# Altium PCB 3phasedriver.PcbDoc
Units mm, origin at the board's own origin, x right, y up, seen from the top; angles counter-clockwise.
Board outline 80.39 x 38.35 mm, 2 copper layers (Top Layer, Bottom Layer); 51 components, 69 nets, 254 pads, 69 vias.
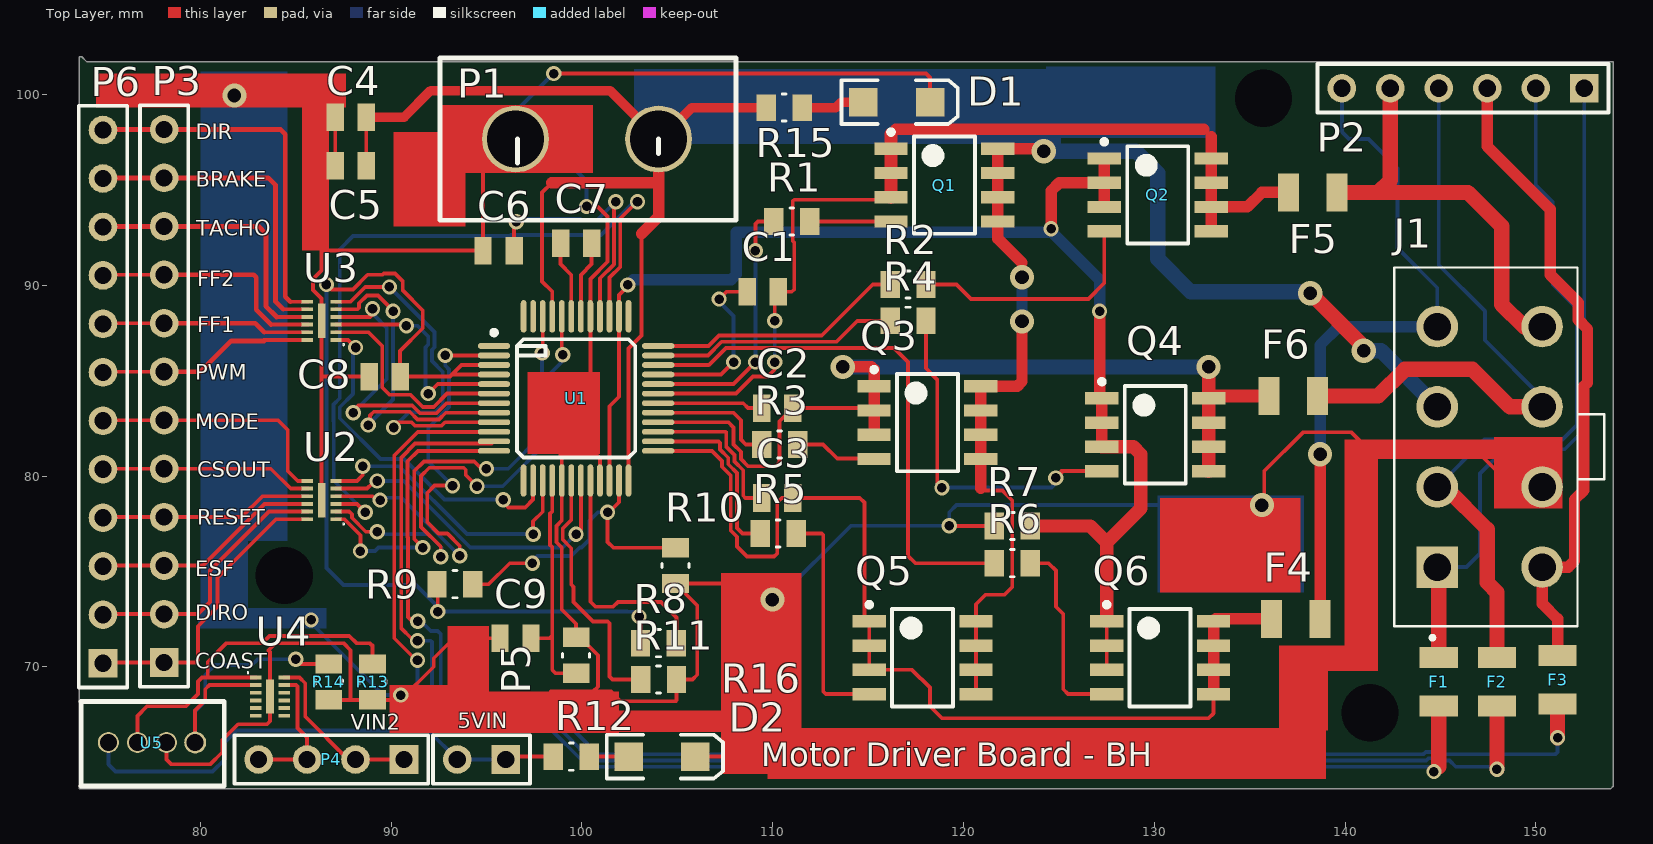
[diagram p0: Top Layer view]
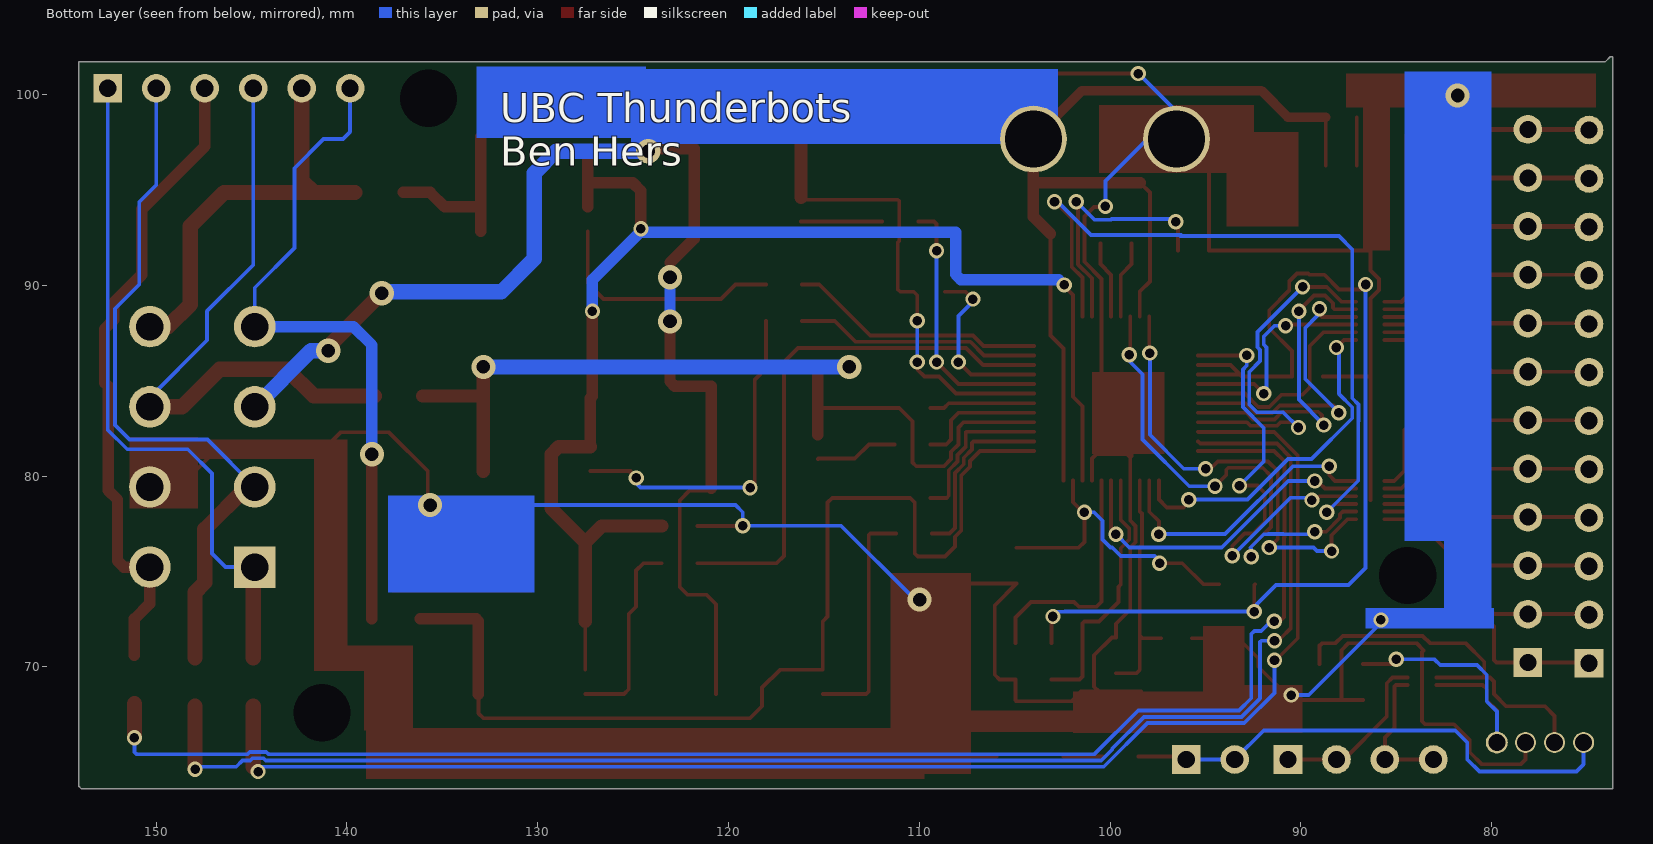
[diagram p1: Bottom Layer view, seen from below]

## Layer stack, top to bottom
Top Solder: solder mask 0.0102, Solder Resist, Dk 3.5
Top Layer: signal copper 0.0356
Dielectric 1: dielectric 0.32, FR-4, Dk 4.8
Bottom Layer: signal copper 0.0356
Bottom Solder: solder mask 0.0102, Solder Resist, Dk 3.5

## Board outline
73.66,101.981 73.66,63.627 153.924,63.627 154.051,63.754 154.051,101.727 74.041,101.727 73.787,101.981

## Design rules (kind name [scope] priority, off if disabled: settings)
Clearance [All] p1: gap=0.2 ignorepadtopadclearanceinfootprint=FALSE except(0: Arc-Hole Track-Hole SMDPad-Hole THPad-Hole Via-Hole Fill-Hole Poly-Hole Region-Hole Text-Hole; 0.13: Arc-Arc Arc-Track Arc-SMDPad Track-Track Track-SMDPad; 0.254: Arc-Text Track-Text SMDPad-Text THPad-Text Via-Fill Via-Poly Via-Region Via-Text Fill-Fill Fill-Poly Fill-Region Fill-Text Poly-Poly Poly-Region Poly-Text Region-Region Region-Text Text-Text)
HoleSize [All] p1: absolutevalues=TRUE maxlimit=4 minlimit=0.025 maxpercent=80.000 minpercent=20.000
MinimumSolderMaskSliver [All] p1: minsoldermaskwidth=0.08
PolygonConnect [All] p1: connectstyle=Relief reliefconductorwidth=0.254 reliefentries=4 polygonreliefangle="90 Angle" airgapwidth=0.254
RoomDefinition 3phasedriver [InComponentClass('3phasedriver')] p1: confinementstyle=ConfineIn formatcopy=TRUE lockcomponents=FALSE outline 73.279,63.246 73.279,101.854 92.075,101.854 92.456,102.235 127.248,102.235 127.629,101.854 154.051,101.854 154.051,63.5 153.797,63.246
RoutingVias [All] p1: holewidth=0.711 width=1.27 viastyle="Through Hole" minholewidth=0.5 minwidth=0.8 maxholewidth=0.711 maxwidth=1.27
SilkToSilkClearance [All] p1 off: silktosilkclearance=0
SilkToSolderMaskClearance [IsPad] p1 off: minsilkscreentomaskgap=0.15 clearancetoexposedcopper=FALSE
SolderMaskExpansion [All] p1: expansion=0.102
Width [All] p1: maxlimit=1 minlimit=0.15 preferedwidth=0.2
26 further rules are at their usual default settings.

## Components (designator, comment, footprint, x,y, rotation, side; value= is the part's Value field where it differs from the comment)
C1 "0805" CAPC2013X110N 109.474,89.662 r0 top
C2 "0805" CAPC2013X110N 110.236,83.566 r0 top
C3 "0805" CAPC2013X110N 110.236,78.856 r0 top
C4 "0805" CAPC2013X110N 87.884,98.806 r0 top
C5 "0805" CAPC2013X110N 87.884,96.266 r0 top
C6 "0805" CAPC2013X110N 95.631,91.821 r0 top
C7 "0805" CAPC2013X110N 99.695,92.202 r0 top
C8 "0805" CAPC2013X110N 89.662,85.217 r0 top
C9 "0805" CAPC2013X110N 96.52,71.501 r0 top
D1 "LED2" 3.2X1.6X1.1 116.5,99.6 r0 top
D2 "LED2" 3.2X1.6X1.1 104.2,65.3 r0 top
F1 "Fuse 1206" PCBComponent_1#1 145.288,71.501 r90 top
F2 "Fuse 1206" PCBComponent_1#1 148.336,71.501 r90 top
F3 "Fuse 1206" PCBComponent_1#1 151.511,71.628 r90 top
F4 "Fuse 1206" PCBComponent_1#1 139.7,72.136 r0 top
F5 "Fuse 1206" PCBComponent_1#1 140.589,94.488 r0 top
F6 "Fuse 1206" PCBComponent_1#1 139.573,83.82 r0 top
J1 "Motor Molex Connector" *MOLEX_0039281083 147.574,81.534 r90 top
P1 "XT60" PCBComponent_1#2 108.07,93.413 r180 top
P2 "Header 6" HDR1X6 152.527,100.33 r180 top
P3 "Header 12" HDR1X12 78.105,70.231 r90 top
P4 "Header 4" HDR1X4 90.678,65.151 r180 top
P5 "Header 2" HDR1X2 96.012,65.151 r180 top
P6 "Header 12" HDR1X12 74.9,70.199 r90 top
Q1 "AO4884" SOIC127P600X170-8N 118.999,95.25 r0 top
Q2 "AO4884" SOIC127P600X170-8N 130.175,94.742 r0 top
Q3 "AO4884" SOIC127P600X170-8N 118.11,82.804 r0 top
Q4 "AO4884" SOIC127P600X170-8N 130.048,82.169 r0 top
Q5 "AO4884" SOIC127P600X170-8N 117.856,70.485 r0 top
Q6 "AO4884" SOIC127P600X170-8N 130.302,70.485 r0 top
R1 "0805" RESC2013X65N 110.998,93.345 r180 top
R2 "0805" RESC2013X65N 117.094,90.043 r180 top
R3 "0805" RESC2013X65N 110.363,81.661 r180 top
R4 "0805" RESC2013X65N 117.094,88.138 r180 top
R5 "0805" RESC2013X65N 110.287,76.996 r180 top
R6 "0805" RESC2013X65N 122.555,75.438 r180 top
R7 "0805" RESC2013X65N 122.555,77.389 r0 top
R8 "0805-100k" RESC2013X65N 104.013,71.247 r0 top
R9 "0805-150K" RESC2013X65N 93.345,74.336 r0 top
R10 "0805-10K" RESC2013X65N 104.902,75.311 r270 top
R11 "0805-10K" RESC2013X65N 104.02,69.342 r0 top
R12 "0805-47k" RESC2013X65N 99.695,70.612 r90 top
R13 "0805" RESC2013X65N 89.027,69.215 r90 top
R14 "0805" RESC2013X65N 86.741,69.215 r90 top
R15 "0805" RESC2013X65N 110.6,99.314 r180 top
R16 "0805" RESC2013X65N 99.445,65.3 r180 top
U1 "A3931" CQFP50P900X900X160-48N 99.695,84.074 r0 top
U2 "EMI Filter" Filter 86.614,80.645 r90 top
U3 "EMI Filter" Filter 86.614,90.043 r90 top
U4 "EMI Filter" Filter 83.4,66.548 r270 top
U5 "Encoder" PCBComponent_1#3 76.811,65.913 r180 top

## Footprints (in the part's own frame and the unit in brackets; to place one, negate y for a bottom-side part, rotate by r counter-clockwise, add the part's x,y. Pads: shape width x height; smd on the part's side, far side on the other; paste and mask are expansions set on the pad)
3.2X1.6X1.1 [mm] "SMT LED; 2 Flat Leads"
  rect 1.5x1.5 smd: 1(-1.75,0) 2(1.75,0)
  silkscreen extent -2.9,-1.15 3.2,1.15
*MOLEX_0039281083 [mm]
  rect 2.175x2.175 hole 1.45: 1(-6.3,2.75)
  round 2.175 hole 1.45: 2(-2.1,2.75) 3(2.1,2.75) 4(6.3,2.75) 5(-6.3,-2.75) 6(-2.1,-2.75) 7(2.1,-2.75) 8(6.3,-2.75)
  silkscreen extent -10.1,-6 9.4,5
CAPC2013X110N [mil]
  rect 36x57 smd: 1(-32,0) 2(32,0)
CQFP50P900X900X160-48N [mm] "CQFP, 48-Leads, Body 9.00x9.00mm, Pitch 0.50mm, IPC Medium Density"
  oval 1.7x0.3 smd: 1(-4.3,2.75) 2(-4.3,2.25) 3(-4.3,1.75) 4(-4.3,1.25) 5(-4.3,0.75) 6(-4.3,0.25) 7(-4.3,-0.25) 8(-4.3,-0.75) 9(-4.3,-1.25) 10(-4.3,-1.75) 11(-4.3,-2.25) 12(-4.3,-2.75) 25(4.3,-2.75) 26(4.3,-2.25) 27(4.3,-1.75) 28(4.3,-1.25) 29(4.3,-0.75) 30(4.3,-0.25) 31(4.3,0.25) 32(4.3,0.75) 33(4.3,1.25) 34(4.3,1.75) 35(4.3,2.25) 36(4.3,2.75)
  oval 0.3x1.7 smd: 13(-2.75,-4.3) 14(-2.25,-4.3) 15(-1.75,-4.3) 16(-1.25,-4.3) 17(-0.75,-4.3) 18(-0.25,-4.3) 19(0.25,-4.3) 20(0.75,-4.3) 21(1.25,-4.3) 22(1.75,-4.3) 23(2.25,-4.3) 24(2.75,-4.3) 37(2.75,4.3) 38(2.25,4.3) 39(1.75,4.3) 40(1.25,4.3) 41(0.75,4.3) 42(0.25,4.3) 43(-0.25,4.3) 44(-0.75,4.3) 45(-1.25,4.3) 46(-1.75,4.3) 47(-2.25,4.3) 48(-2.75,4.3)
  silkscreen extent -4.42,-3.1 3.1,3.57, body extent -3.5,-3.5 3.5,3.5, height 1.6
Filter [mm] "EMIFilter"
  rect 0.2x0.6 smd mask+0.05: 1(-2.9,-0.5) 2(-2.5,-0.5) 3(-2.1,-0.5) 4(-1.7,-0.5) 5(-1.3,-0.5) 6(-0.9,-0.5) 7(-2.9,1) 8(-2.5,1) 9(-2.1,1) 10(-1.7,1) 11(-1.3,1) 12(-0.9,1)
  rect 1.8x0.4 smd: GND(-1.905,0.254)
  silkscreen extent -3.2,-0.95 -3.1,-0.85
HDR1X2 [mm] "Connector; Header; 2 Position"
  rect 1.5x1.5 hole 0.9: 1(0,0)
  round 1.5 hole 0.9: 2(2.54,0)
  silkscreen extent -1.27,-1.27 3.81,1.27
HDR1X4 [mm] "Connector; Header; 4 Position"
  rect 1.5x1.5 hole 0.9: 1(0,0)
  round 1.5 hole 0.9: 2(2.54,0) 3(5.08,0) 4(7.62,0)
  silkscreen extent -1.27,-1.27 8.89,1.27
HDR1X6 [mm] "Connector; Header; 6 Position"
  rect 1.5x1.5 hole 0.9: 1(0,0)
  round 1.5 hole 0.9: 2(2.54,0) 3(5.08,0) 4(7.62,0) 5(10.16,0) 6(12.7,0)
  silkscreen extent -1.27,-1.27 13.97,1.27
HDR1X12 [mm] "Connector; Header; 12 Position"
  rect 1.5x1.5 hole 0.9: 1(0,0)
  round 1.5 hole 0.9: 2(2.54,0) 3(5.08,0) 4(7.62,0) 5(10.16,0) 6(12.7,0) 7(15.24,0) 8(17.78,0) 9(20.32,0) 10(22.86,0) 11(25.4,0) 12(27.94,0)
  silkscreen extent -1.27,-1.27 29.21,1.27
PCBComponent_1#1 [mm]
  rect 1.1x2 smd: 1(-3.556,0.381) 2(-1.016,0.381)
PCBComponent_1#2 [mm]
  round 3.5 hole 3: 1(4.05,-4.25) 2(11.55,-4.25)
  silkscreen extent 0,-8.5 15.5,0
PCBComponent_1#3 [mm]
  round 1.1 hole 0.9: 5V(1.627,-0.127) GND(-1.421,-0.127) VIN2(0.103,-0.127)
  round 1.15 hole 0.9: VIN1(-2.921,-0.127)
  silkscreen extent -4.44,-2.29 3.06,2.16
RESC2013X65N [mil]
  rect 40x55 smd: 1(-37,0) 2(37,0)
  silkscreen extent -4,-28 4,28
SOIC127P600X170-8N [mm] "SOIC, 8-Leads, Body 5.00x3.90mm, Pitch 1.27mm, IPC Medium Density"
  rect 1.75x0.65 smd: D(2.8,-1.905) D(2.8,-0.635) D(2.8,0.635) D(2.8,1.905) G(-2.8,-1.905) S(-2.8,-0.635) S(-2.8,0.635) S(-2.8,1.905)
  silkscreen extent -2.92,-2.55 1.6,2.9, body extent -2,-2.55 2,2.55, height 1.7

## Part data
C1 C2 C3 C4 C5 C6 C7 C8 C9: library part C0805C104K5RACTU, "Capacitor; Ceramic; Cap; .100UF ; Tol+-10%; SMD; Vol-Rtg 50V; X7R, Tape/Reel", Package="0805 Kemet", Availability=Good, MF=Kemet, MP=C0805C104K5RACTU, Price="0.86 USD"
D1 D2: "Typical RED, GREEN, YELLOW, AMBER GaAs LED", LatestRevisionDate=17-Jul-2002, LatestRevisionNote="Re-released for DXP Platform.", PackageDescription="SM LED; 2 Flat Leads", PackageReference=3.2X1.6X1.1, PackageVersion=Feb-2002, Published=8-Jun-2000, Publisher="Altium Limited"
F1 F2 F3 F4 F5 F6: library part F?
J1: library part 0039281083, "Conn Power HDR 8 POS 4.2mm Solder ST Thru-Hole 8 Terminal 1 Port Mini-Fit Jr??? Bag", Package=None, Availability=Unavailable, MF=Molex, MP=0039281083, Price=None, SnapEDA_Link=https://www.snapeda.com/parts/0039281083/Molex/view-part/?ref=snap
P1 Q1 Q2 Q3 Q4 Q5 Q6 U1 U5: library part Component_1
P2: "Header, 6-Pin", LatestRevisionDate=17-Jul-2002, LatestRevisionNote="Re-released for DXP Platform.", Publisher="Altium Limited"
P3 P6: "Header, 12-Pin", LatestRevisionDate=17-Jul-2002, LatestRevisionNote="Re-released for DXP Platform.", Publisher="Altium Limited"
P4: "Header, 4-Pin", LatestRevisionDate=17-Jul-2002, LatestRevisionNote="Re-released for DXP Platform.", Publisher="Altium Limited"
P5: "Header, 2-Pin", LatestRevisionDate=17-Jul-2002, LatestRevisionNote="Re-released for DXP Platform.", Publisher="Altium Limited"
R1 R2 R3 R4 R5 R6 R7 R8 R9 R10 R11 R13 R14 R15 R16: library part RC0805FR-072K2L, "Res Thick Film 0805 2.2K Ohm 1% 0.125W_1/8W_ }100ppm/ Molded SMD Paper T/R", Package="0805 Yageo", Availability=Good, MF=Yageo, MP=RC0805FR-072K2L, Price="0.01 USD", SnapEDA_Link=https://www.snapeda.com/parts/RC0805FR-072K2L/Yageo/view-part/?ref=snap
R12: library part RC0805FR-072K2L, "47 kOhms ±1% 0.125W, 1/8W Chip Resistor 0805 (2012 Metric) Moisture Resistant Thick Film", Package="0805 Yageo", Availability=Good, MF=Yageo, MP=RC0805FR-072K2L, Price="0.01 USD", SnapEDA_Link=https://www.snapeda.com/parts/RC0805FR-072K2L/Yageo/view-part/?ref=snap
U2 U3 U4: library part EMIFilter

## Free pads (board coordinates)
  round 1.524 hole 3: 3(84.4,74.8) 3(135.725,99.8) 3(141.3,67.6)

## Via types
v1: diameter 0.8, hole 0.5, Top Layer to Bottom Layer, tented both sides, 58 vias
v2: diameter 1.27, hole 0.711, Top Layer to Bottom Layer, 11 vias

## Nets (pads, with @x,y where several pads share a name; then routed paths per layer and width w, separated by ;. In a path a pad name is that pad's centre, name@x,y a point inside that pad or via, vN(x,y) a via of type N, cw(c..) or ccw(c..) an arc to the next point about the centre after c; other vN are vias at no path point)
5VIN: P5.1 P5.2 R16.2 U5.5V | length 26.7
  Top Layer w0.2: P5.1 96.161,65.3 R16.2
  Bottom Layer w0.2: U5.5V 75.184,64.897 75.565,64.516 80.645,64.516 81.28,65.151 81.28,66.04 81.915,66.675 91.948,66.675 P5.2 P5.1
BRAKE: U1.8 U3.5 | length 17.4
  Top Layer w0.2: U3.5 88.235,88.743 88.327,88.835 88.327,89.063 88.737,89.473 89.317,89.473 89.952,88.838 90.105,88.838 v1(90.105,88.646) ; v1@88.9,83.058 88.9,83.185 89.093,83.378 90.975,83.378 91.385,82.968 92.511,82.968 92.867,83.324 U1.8
  Bottom Layer w0.2: v1(88.809,82.677) 88.809,82.713 90.105,84.009 v1(90.105,88.646)
CA: C1.1 U1.33 | length 9.3
  Top Layer w0.2: U1.33 107.295,85.324 v1(107.95,85.979) ; v1(107.188,89.281) 107.569,89.662 C1.1
  Bottom Layer w0.2: v1@107.315,89.154 107.315,89.027 107.95,88.392 v1(107.95,85.979)
CB: C2.1 U1.30 | length 5.5
  Top Layer w0.2: U1.30 108.454,83.824 108.712,83.566 C2.1
CC: C3.1 U1.27 | length 8.3
  Top Layer w0.2: U1.27 107.541,82.324 107.569,82.296 107.569,81.534 108.001,81.102 108.001,80.762 108.458,80.305 108.458,78.973 108.575,78.856 C3.1
COAST: U1.46 U2.1 | length 23.8
  Top Layer w0.2: U2.1 87.553,77.745 88.392,76.906 v1(88.392,76.073) ; v1(91.658,76.255) 91.211,76.702 91.211,80.264 91.719,80.772 94.361,80.772 94.742,80.391 v1(94.996,80.391) ; v1@97.945,86.642 U1.46
  Bottom Layer w0.2: v1(88.392,76.073) 89.154,76.073 89.336,76.255 v1(91.658,76.255) ; v1(94.996,80.391) 96.139,80.391 97.917,82.169 v1(97.917,86.451)
CP1: C7.2 U1.42 | length 4.1
  Top Layer w0.2: U1.42 99.945,90.547 100.508,91.11 C7.2
CP2: C7.1 U1.43 | length 4.1
  Top Layer w0.2: C7.1 98.882,91.11 99.445,90.547 U1.43
CSN: C4.1 C5.1 C6.1 C8.1 C9.1 D1.2 D2.2 J1.6 P1.2 R7.1 R10.2 R11.2 R12.2 R13.1 R14.1 U1.17 U1.21 U1.41 U2.GND U3.GND U4.GND U5.GND | length 200.6
  Top Layer w0.2: U5.GND 78.232,65.151 78.486,64.897 80.518,64.897 81.153,65.532 81.153,66.167 81.986,67 83.5,67 83.654,67.154 U4.GND 83.654,70.778 83.566,70.866 83.947,71.247 87.503,71.247 87.873,70.877 87.873,68.286 87.884,68.275 ; U2.GND 86.36,85.217 ; 86.36,93.218 86.36,91.821 ; R14.1 87.884,68.275 ; C5.1 C4.1 ; C8.1 86.36,85.217 ; C9.1 93.283,71.501 92.238,70.456 92.238,70.013 90.5,68.275 R13.1 87.884,68.275 ; P1.2 94.818,95.961 C6.1 86.36,91.821 ; 98.385,68.707 100.584,68.707 ; v1(98.525,101.1) 118.034,101.1 118.25,100.884 D1.2 ; 98.882,83.665 98.882,81.039 98.945,80.976 ; 100.076,82.169 100.076,81.153 ; 100.445,84.836 U1.41 100.445,90.336 101.346,91.237 101.346,93.599 100.838,94.107 v1@100.445,94.107 ; U1.21 100.945,80.919 100.711,81.153 100.076,81.153 ; D2.2 108.3,65.3 ; 107.899,74.371 R10.2 106.045,73.228 106.045,69.596 105.791,69.342 R11.2 104.96,68.257 104.902,68.199 102.025,68.199 101.517,68.707 100.584,68.707 ; v1@119.426,77.389 R7.1 ; v2@135.763,78.272 135.763,80.264 137.795,82.296 140.335,82.296 141.224,81.407 146.812,81.407 148.785,79.434 J1.6 ; 86.36,85.217 U3.GND 86.36,89.307 85.914,89.753 85.914,90.333 86.36,90.779 86.36,91.821 ; 98.945,80.976 U1.17 98.945,77.669 98.665,77.389 98.665,76.535 98.945,76.255 98.945,73.013 99.695,72.263 R12.2 99.898,71.552 100.838,70.612 100.838,68.961 100.584,68.707 ; 98.945,80.976 99.122,81.153 100.076,81.153
  Bottom Layer w0.2: v1@85.856,72.263 89.59,68.529 v1(90.507,68.529) ; v1(98.525,101.1) 98.506,101.1 96.52,99.114 P1.2 98.044,97.663 100.247,95.46 v1(100.247,94.133) ; v2@110.363,73.66 114.102,77.399 v1(119.253,77.399) 119.253,78.105 119.634,78.486 v2(135.636,78.486)
  other v1: 85.808,72.466
  other v2: 109.982,73.533 81.788,99.949
CSOUT: U1.19 U2.5 | length 17.1
  Top Layer w0.2: U2.5 88.743,79.345 v1@89.027,79.629 ; v1(99.695,76.962) 99.945,77.212 U1.19
  Bottom Layer w0.2: v1(89.281,79.745) 90.667,79.745 94.15,76.262 98.995,76.262 v1(99.695,76.962)
CSP: Q2.S Q4.S Q6.S R7.2 U1.22 U1.38 | length 73.6
  Top Layer w0.2: U1.22 101.445,83.665 101.945,84.165 U1.38 101.945,89.499 v1@102.235,89.789 ; Q4.S@127.127,84.195 Q4.S@127.248,84.074 ; Q6.S@127.502,69.85 127.502,71.12 Q6.S@127.502,72.39
  Top Layer w0.6: v1(124.587,92.964) 124.587,94.945 125.019,95.377 Q2.S@127.375,95.377 ; Q4.S@127.127,84.195 v1(127.127,88.646) ; Q4.S@127.248,81.534 127.248,82.804 Q4.S@127.248,84.074 ; Q2.S@127.375,94.107 Q2.S@127.375,95.377 ; Q2.S@127.375,96.647 Q2.S@127.375,95.377
  Top Layer w0.7: R7.2 126.636,77.389 127.502,76.522 ; Q4.S@127.248,81.534 128.905,81.534 129.286,81.153 129.286,78.306 127.502,76.522 ; Q6.S@127.502,72.39 127.502,76.522
  Bottom Layer w0.2: v1(102.406,90.019) v1@102.687,90.3 ; v1(124.587,92.964) 124.587,92.837 v1@124.65,92.773
  Bottom Layer w0.6: v1@102.687,90.3 107.826,90.3 108.1,90.574 108.1,92.773 124.65,92.773 127.127,90.297 v1(127.127,88.646)
DIR: U1.9 U3.6 | length 19.1
  Top Layer w0.2: U3.6 87.873,89.143 88.646,89.916 v1(89.916,89.916) ; v1@90.105,82.677 90.252,82.824 91.062,82.824 91.248,82.638 92.648,82.638 92.834,82.824 U1.9
  Bottom Layer w0.2: v1(89.916,89.916) 92.278,87.554 92.278,86.755 92.137,86.614 92.137,86.034 92.71,85.461 92.71,83.761 92.301,83.352 90.932,83.352 v1(90.13,82.55)
DIRO: U1.44 U2.2 | length 26.6
  Top Layer w0.2: U2.2 87.803,78.145 87.946,78.002 87.946,77.819 88.676,77.089 v1(89.281,77.089) ; v1(92.599,75.782) 92.599,76.304 91.567,77.336 91.567,80.01 91.999,80.442 93.802,80.442 93.912,80.332 93.912,80.061 v1(94.503,79.47) ; v1@98.945,86.626 U1.44
  Bottom Layer w0.2: v1(89.281,77.089) 89.415,76.955 90.925,76.955 90.932,76.962 91.694,76.962 91.701,76.955 91.948,76.955 92.658,76.245 92.599,76.186 v1(92.599,75.782) ; v1(94.503,79.47) 95.853,79.47 98.298,81.915 98.298,85.344 98.995,86.041 v1(98.995,86.36)
ESF: U1.39 U2.3 | length 39.4
  Top Layer w0.2: U2.3 88.21,78.545 v1(88.646,78.109) ; U1.39 101.445,90.402 102.006,90.963 102.006,93.497 v1@102.692,94.183
  Bottom Layer w0.2: v1@88.646,78.105 86.995,79.756 86.995,82.883 86.981,82.897 86.981,83.751 87.314,84.084 87.314,91.886 88.011,92.583 96.323,92.583 96.274,92.632 101.006,92.632 102.761,94.387 v1(102.914,94.387)
GHA: R1.2 U1.32 | length 13.5
  Top Layer w0.2: U1.32 107.938,84.824 v1@108.938,85.824 ; v1(109.093,91.808) 109.093,93.218 109.22,93.345 R1.2
  Bottom Layer w0.2: v1(109.093,85.979) v1@109.093,91.694
GHB: R3.2 U1.29 | length 6.7
  Top Layer w0.2: U1.29 107.938,83.324 108.331,82.931 108.331,81.915 108.585,81.661 R3.2
GHC: R5.2 U1.26 | length 9.4
  Top Layer w0.2: U1.26 107.152,81.824 107.239,81.737 107.239,81.397 107.671,80.965 107.671,80.626 108.128,80.169 108.128,77.288 108.42,76.996 R5.2
GLA: R2.2 U1.36 | length 13.5
  Top Layer w0.2: U1.36 106.636,86.824 107.188,87.376 112.572,87.376 115.239,90.043 R2.2
GLB: R4.2 U1.35 | length 12.9
  Top Layer w0.2: U1.35 106.603,86.324 107.325,87.046 113.335,87.046 114.427,88.138 R4.2
GLC: R6.2 U1.34 | length 28.6
  Top Layer w0.2: U1.34 106.652,85.824 107.544,86.716 116.357,86.716 117.094,85.979 117.094,75.819 117.475,75.438 R6.2
M1FF1: U1.6 U3.2 | length 11.5
  Top Layer w0.2: U3.2 88.809,87.543 89.536,86.816 89.536,84.649 89.922,84.263 91.023,84.263 91.658,83.628 92.238,83.628 92.934,84.324 U1.6
M1FF2: U1.5 U3.3 | length 11.9
  Top Layer w0.2: U3.3 90.746,87.943 v1(90.805,87.884) ; v1(91.948,84.328) 92.444,84.824 U1.5
  Bottom Layer w0.2: v1(90.805,87.884) 91.39,87.884 91.948,87.326 91.948,86.892 91.807,86.751 91.807,84.469 v1(91.948,84.328)
M1H1: F1.1 U1.10 | length 76.8
  Top Layer w0.2: v1@91.186,70.485 90.17,71.501 90.17,81.081 91.397,82.308 95.379,82.308 U1.10 ; v1(144.653,64.516) v1@144.907,64.77
  Top Layer w0.8: v1@144.907,64.77 F1.1
  Bottom Layer w0.2: v1(91.385,70.358) 91.385,68.642 92.971,67.056 98.044,67.056 100.33,64.77 v1@144.526,64.77
M1H2: F2.1 U1.11 | length 79.1
  Top Layer w0.2: v1@91.059,71.501 90.537,72.023 90.537,80.982 91.259,81.704 95.275,81.704 U1.11
  Top Layer w0.8: v1(147.955,64.643) F2.1
  Bottom Layer w0.2: v1(91.385,71.374) 92.075,71.374 92.137,71.312 92.137,68.356 93.107,67.386 98.222,67.386 99.884,65.724 99.884,65.683 100.467,65.1 144.247,65.1 144.363,65.216 144.943,65.216 145.059,65.1 145.466,65.1 145.796,64.77 v1@147.701,64.77
M1H3: F3.1 U1.12 | length 80.5
  Top Layer w0.2: v1@91.111,72.39 90.881,72.62 90.881,76.785 90.867,76.799 90.867,80.782 91.409,81.324 U1.12
  Top Layer w0.8: v1(151.13,66.294) F3.1
  Bottom Layer w0.2: v1(91.395,72.394) 91.563,72.394 92.075,71.882 92.441,71.882 92.599,71.724 92.599,68.361 93.244,67.716 98.527,67.716 100.813,65.43 144.11,65.43 144.226,65.546 145.08,65.546 145.196,65.43 151.028,65.43 151.13,65.532 v1(151.13,66.294)
M1P1: C2.2 F6.1 Q3.S Q4.D U1.28 | length 48.4
  Top Layer w0.2: U1.28 107.676,82.824 107.95,82.55 107.95,81.661 108.331,81.28 108.331,80.899 108.712,80.518 110.16,80.518 110.363,80.721 110.363,82.88 C2.2 115.183,83.566 Q3.S@115.31,83.439 ; 115.177,85.725 115.31,85.592 ; Q4.D@132.848,84.074 132.842,84.08 Q4.D@132.963,84.201
  Top Layer w0.6: v2(113.665,85.725) 115.177,85.725 ; Q3.S@115.31,82.169 115.31,83.439 115.31,84.709 115.31,85.592
  Top Layer w0.7: Q4.D@132.842,84.08 v2(132.842,85.725) ; Q4.D@132.848,80.264 132.848,81.534 132.848,82.804 Q4.D@132.848,84.074 ; Q4.D@132.963,84.201 F6.1
  Bottom Layer w0.2: v2@132.334,85.725 v2@132.588,85.471
  Bottom Layer w0.8: v2(113.665,85.725) v2@132.334,85.725
M1P2: C1.2 F5.1 Q1.S Q2.D U1.31 | length 50.9
  Top Layer w0.2: U1.31 108.073,84.324 108.966,85.217 109.728,85.217 110.109,85.598 v1@110.109,85.824 ; v1(110.109,88.138) 110.109,89.484 C1.2 110.998,89.662 111.125,89.789 111.125,92.253 111.049,92.329 111.049,94.412 111.125,94.488 116.072,94.488 Q1.S@116.199,94.615 ; 116.199,97.911 116.459,98.171 ; 132.594,98.171 132.975,97.79
  Top Layer w0.6: 116.459,98.171 132.594,98.171 ; Q2.D@132.975,92.837 Q2.D@132.975,94.107 ; 132.975,97.79 132.975,96.647 132.975,95.377 Q2.D@132.975,94.107 ; F5.1 135.636,94.869 134.874,94.107 Q2.D@132.975,94.107
  Top Layer w0.7: Q1.S@116.199,94.615 116.199,95.885 116.199,97.155 116.199,97.911
  Bottom Layer w0.2: v1(110.109,85.979) v1@110.109,88.011
M1P3: C3.2 F4.1 Q5.S Q6.D U1.25 | length 54.8
  Top Layer w0.2: U1.25 106.814,81.324 107.341,80.797 107.341,80.489 107.798,80.032 107.798,77.151 108.128,76.821 108.128,76.314 108.66,75.782 110.072,75.782 110.236,75.946 110.236,78.618 110.474,78.856 C3.2 114.565,78.856 114.808,78.613 114.808,72.638 115.056,72.39 115.056,71.12 115.056,69.85 117.308,69.85 118.237,68.921 118.237,67.945 118.872,67.31 132.842,67.31 133.102,67.57 Q6.D@133.102,68.58 ; Q6.D@133.102,72.39 Q6.D@133.229,72.517
  Top Layer w0.6: Q6.D@133.102,68.58 133.102,69.85 133.102,71.12 Q6.D@133.102,72.39 ; Q6.D@133.229,72.517 F4.1
MODE: U1.15 U2.6 | length 15.4
  Top Layer w0.2: U2.6 88.206,79.745 88.519,80.058 v1(88.519,80.518) ; v1(97.445,76.962) 97.445,77.633 97.945,78.133 U1.15
  Bottom Layer w0.2: v1(88.519,80.518) 90.424,80.518 93.98,76.962 v1(97.445,76.962)
NetC6_2: C6.2 U1.40 | length 13.5
  Top Layer w0.2: C6.2 96.444,93.212 v1(96.564,93.332) ; U1.40 100.945,90.369 101.676,91.1 101.676,94.183 v1@101.727,94.234
  Bottom Layer w0.2: v1@96.52,93.218 96.774,93.472 99.918,93.472 99.957,93.433 100.817,93.433 v1(101.771,94.387)
NetD1_1: D1.1 R15.1 | length 3.3
  Top Layer w0.5: R15.1 113.314,99.314 113.6,99.6 D1.1
NetD2_1: D2.1 R16.1 | length 2.1
  Top Layer w0.2: R16.1 D2.1
NetF1_2: F1.2 J1.1 P2.1 | length 35.8
  Top Layer w0.2: J1.1 J1.1@144.907,75.151
  Top Layer w0.8: F1.2 J1.1@144.907,75.151
  Bottom Layer w0.2: J1.1 146.354,75.234 147.066,75.946 147.066,80.137 148.336,81.407 151.511,81.407 152.527,82.423 P2.1
NetF2_2: F2.2 J1.2 P2.2 | length 37.7
  Top Layer w0.2: J1.2 J1.2@145.229,79.434
  Top Layer w0.8: J1.2@145.229,79.434 147.447,77.216 147.447,74.422 147.955,73.914 F2.2
  Bottom Layer w0.2: J1.2 147.305,81.915 151.384,81.915 152.146,82.677 152.146,88.773 150.876,90.043 150.876,94.361 149.987,95.25 P2.2
NetF3_2: F3.2 J1.5 P2.3 | length 34
  Top Layer w0.6: P2.3 147.447,97.282 150.749,93.98 150.749,90.551 152.212,89.088 152.212,88.199 152.7,87.711 152.7,84.904 152.5,84.704 152.5,79.253 152.019,78.772 152.019,75.565 151.688,75.234 J1.5 150.324,73.323 151.13,72.517 F3.2
NetF4_2: F4.2 J1.4 P2.6 | length 35.8
  Top Layer w0.6: F4.2 v2@138.684,80.899
  Bottom Layer w0.2: P2.6 139.827,98.044 140.208,97.663 141.224,97.663 142.748,96.139 142.748,91.948 144.824,89.872 J1.4
  Bottom Layer w0.6: v2(138.684,81.153) 138.684,86.868 139.65,87.834 J1.4
NetF5_2: F5.2 J1.8 P2.5 | length 21.8
  Top Layer w0.2: J1.8@149.366,87.834 J1.8
  Top Layer w0.8: F5.2 141.732,94.869 ; P2.5 142.367,95.504 141.732,94.869 ; J1.8@149.366,87.834 148.2,89 148.2,93.1 146.431,94.869 141.732,94.869
NetF6_2: F6.2 J1.7 P2.4 | length 32.1
  Top Layer w0.8: F6.2 141.732,84.201 143.129,85.598 146.673,85.598 148.637,83.634 J1.7
  Bottom Layer w0.2: P2.4 144.907,91.059 147.32,88.646 147.32,87.122 150.324,84.118 J1.7
NetP3_1: P3.1 P6.1 U2.7 | length 15.3
  Top Layer w0.2: P6.1@75.311,70.231 P3.1 79.756,70.231 79.883,70.358 79.883,72.136 80.899,73.152 80.899,74.676 83.968,77.745 U2.7
NetP3_2: P3.2 P6.2 U2.8 | length 13.5
  Top Layer w0.2: P6.2@75.311,72.771 P3.2 79.883,72.771 80.518,73.406 80.518,75.057 83.606,78.145 U2.8
NetP3_3: P3.3 P6.3 U2.9 | length 11.6
  Top Layer w0.2: P6.3@75.311,75.311 P3.3 80.137,75.311 83.371,78.545 U2.9
NetP3_4: P3.4 P6.4 U2.10 | length 10.8
  Top Layer w0.2: P6.4@75.311,77.851 P3.4 82.169,77.851 83.263,78.945 U2.10
NetP3_5: P3.5 P6.5 U2.11 | length 10.7
  Top Layer w0.2: P6.5@75.311,80.391 P3.5 83.693,80.391 84.739,79.345 U2.11
NetP3_6: P3.6 P6.6 U2.12 | length 12.9
  Top Layer w0.2: P6.6@75.311,82.931 P3.6 84.074,82.931 84.582,82.423 84.582,80.275 85.112,79.745 U2.12
NetP3_7: P3.7 P6.7 U3.7 | length 11
  Top Layer w0.2: P6.7@75.311,85.471 P3.7 ; 83.333,87.143 U3.7
  Top Layer w0.254: P3.7 80.01,85.471 81.628,87.089 83.35,87.089
NetP3_8: P3.8 P6.8 U3.8 | length 10.5
  Top Layer w0.2: P6.8@75.311,88.011 P3.8 ; 83.35,87.543 U3.8
  Top Layer w0.254: P3.8 82.882,88.011 83.35,87.543
NetP3_9: P3.9 P6.9 U3.9 | length 12.4
  Top Layer w0.2: P6.9@75.311,90.551 P3.9 ; 83.712,87.943 U3.9
  Top Layer w0.254: P3.9 82.804,90.551 82.931,90.424 82.931,88.724 83.712,87.943
NetP3_10: P3.10 P6.10 U3.10 | length 14.5
  Top Layer w0.2: 83.996,88.343 U3.10
  Top Layer w0.254: P6.10@75.311,93.091 P3.10 83.058,93.091 83.439,92.71 83.439,88.9 83.996,88.343
NetP3_11: P3.11 P6.11 U3.11 | length 16.7
  Top Layer w0.2: 84.347,88.743 U3.11
  Top Layer w0.254: P6.11@75.311,95.631 P3.11 83.566,95.631 83.947,95.25 83.947,89.143 84.347,88.743
NetP3_12: P3.12 P6.12 U3.12 | length 19
  Top Layer w0.2: 84.72,89.143 U3.12
  Top Layer w0.254: P6.12@75.311,98.171 P3.12 84.201,98.171 84.455,97.917 84.455,89.408 84.72,89.143
NetP4_1: P4.1 P4.2 U4.7 | length 9.1
  Top Layer w0.2: U4.7 85.196,69.448 85.5,69.144 85.5,67.4 87.749,65.151 P4.2 P4.1
NetP4_3: P4.3 P4.4 U4.8 | length 7.3
  Top Layer w0.2: P4.4 P4.3 85.598,66.302 85.1,66.8 85.1,68.973 85.025,69.048 U4.8
NetQ1_G: Q1.G R1.1 | length 4.3
  Top Layer w0.2: R1.1 Q1.G
NetQ2_G: Q2.G R2.1 | length 12.7
  Top Layer w0.2: R2.1 119.634,90.043 120.396,89.281 126.543,89.281 127.375,90.113 Q2.G
NetQ3_G: Q3.G R3.1 | length 4.3
  Top Layer w0.2: R3.1 112.639,81.661 113.381,80.919 115.29,80.919 Q3.G
NetQ4_G: Q4.G R4.1 | length 17.5
  Top Layer w0.2: R4.1 118.034,85.654 118.618,85.07 v1@118.618,79.502 ; v1(124.835,79.906) 125.127,80.198 125.127,80.264 Q4.G
  Bottom Layer w0.2: v1(118.866,79.398) 124.61,79.398 v1@124.841,79.629
NetQ5_G: Q5.G R5.1 | length 12.1
  Top Layer w0.2: R5.1 112.565,76.996 112.649,76.912 112.649,68.707 112.776,68.58 Q5.G
NetQ6_G: Q6.G R6.1 | length 10.3
  Top Layer w0.2: R6.1 124.46,75.438 124.841,75.057 124.841,73.152 125.222,72.771 125.222,68.834 125.476,68.58 Q6.G
NetR13_2: R13.2 U4.1 U5.VIN2 | length 20
  Top Layer w0.2: U5.VIN2 76.708,67.437 77.216,67.945 79.248,67.945 79.883,68.58 79.883,69.243 80.088,69.448 80.391,69.448 ; U4.1 80.391,69.448 ; R13.2 89.027,71.12 88.997,71.12 88.87,71.247 88.189,71.247 87.808,71.628 83.624,71.628 83.243,71.247 81.367,71.247 80.391,70.271 80.391,69.448
NetR14_2: R14.2 U4.2 U5.VIN1 | length 16.4
  Top Layer w0.2: U5.VIN1 79.732,67.716 80.264,68.248 80.264,68.834 80.478,69.048 U4.2 ; v1(85,70.4) 85.245,70.155 R14.2
  Bottom Layer w0.2: U5.VIN1 79.732,67.667 80.264,68.199 80.264,69.596 80.772,70.104 82.7,70.104 82.996,70.4 v1(85,70.4)
PWM: U1.14 U3.1 | length 18.4
  Top Layer w0.2: U3.1 87.736,87.143 v1(88.138,86.741) ; v1@95.885,78.613 96.139,78.359 97.028,78.359 97.445,78.776 U1.14
  Bottom Layer w0.2: v1(88.138,86.741) 88.011,86.614 88.011,84.314 87.311,83.614 87.311,83.034 89.446,80.899 90.678,80.899 92.807,78.77 v1(95.885,78.77)
RC: C9.2 R12.1 U1.16 | length 12.5
  Top Layer w0.2: C9.2 98.298,71.501 98.445,71.648 ; U1.16 98.445,78.145 98.335,78.035 98.335,76.399 98.445,76.289 98.445,71.648 ; R12.1 98.623,69.672 98.445,69.85 98.445,71.648
RDEAD: R11.1 U1.18 | length 13.6
  Top Layer w0.2: U1.18 99.445,77.702 98.995,77.252 98.995,76.672 99.445,76.222 99.445,74.313 99.568,74.19 99.568,73.406 100.584,72.39 101.346,72.39 101.445,72.291 101.445,69.497 101.6,69.342 R11.1
REF: R8.2 U1.20 | length 12.8
  Top Layer w0.2: U1.20 100.445,73.418 100.711,73.152 101.632,73.152 101.886,73.406 104.14,73.406 104.953,72.593 R8.2
RESET: U1.2 U2.4 | length 23.6
  Top Layer w0.2: U2.4 89.027,78.945 89.228,78.744 89.229,78.745 v1(89.424,78.745) ; v1(92.837,86.324) U1.2 ; v1(93.218,79.502) 92.278,79.502 91.897,79.121 91.897,77.593 92.494,76.996 92.948,76.996 93.599,76.345 v1(93.599,75.823)
  Bottom Layer w0.2: v1@89.662,78.867 90.555,78.867 v1(93.599,75.823) ; v1(92.837,86.324) 92.837,85.801 93.04,85.598 93.04,83.618 91.948,82.526 91.948,80.772 v1@93.091,79.629
TACHO: U1.7 U3.4 | length 16
  Top Layer w0.2: U3.4 88.9,88.343 89.027,88.47 v1(89.027,88.773) ; v1@88.138,83.566 88.28,83.708 91.111,83.708 91.521,83.298 92.375,83.298 92.901,83.824 U1.7
  Bottom Layer w0.2: v1(88.011,83.324) 89.775,85.088 89.775,87.771 89.154,88.392
V5: C8.2 R8.1 R9.1 U1.3 U1.4 | length 52.9
  Top Layer w0.2: v1(86.614,90.043) 86.868,89.789 88.011,89.789 88.773,90.551 89.561,90.551 89.626,90.616 90.206,90.616 90.616,90.206 90.616,89.724 91.658,88.682 91.658,87.747 90.475,86.564 C8.2 93.091,85.217 93.198,85.324 ; R9.1 92.441,74.3 v1(92.441,72.902) ; U1.4 93.198,85.324 ; U1.3 93.698,85.824 93.198,85.324 ; v1(102.997,72.644) 103.073,72.568 R8.1
  Bottom Layer w0.2: v1(86.614,90.043) 86.614,75.184 87.503,74.295 91.313,74.295 92.301,73.307 v1@92.301,73.025 ; v1(92.441,72.902) 102.358,72.902 102.362,72.898 102.743,72.898 v1@102.87,72.771
VCC: C4.2 C5.2 J1.3 P1.1 Q1.D Q3.D Q5.D R15.2 U1.24 U1.45 | length 143.1
  Top Layer w0.2: C5.2 C4.2 ; 98.425,95.377 97.917,94.869 97.917,90.207 98.445,89.679 U1.45 ; U1.24 102.445,86.697 103.124,87.376 103.124,92.703 ; 103.886,95.377 104.02,95.511 ; P1.1 P1.1@104.113,97.663 ; Q5.D@120.656,68.58 120.656,69.85 120.656,71.12 120.656,72.39 120.656,73.285 121.158,73.787 122.152,73.787 122.555,74.19 122.555,78.729 122.036,79.248 121.031,79.248 120.91,79.369 ; v2@123.063,90.547 123.063,91.186
  Top Layer w0.5: C4.2 90.678,98.806 92.075,100.203 101.48,100.203 P1.1 ; P1.1@104.113,97.663 105.764,99.314 R15.2
  Top Layer w0.6: 98.425,95.377 103.886,95.377 ; 103.124,92.703 104.02,93.599 104.02,95.511 P1.1 ; 120.91,79.369 120.91,80.899 120.91,82.169 120.91,83.439 120.91,84.709 122.809,84.709 123.063,84.963 v2(123.063,88.11) ; 123.063,91.186 121.799,92.45 121.799,93.345 121.799,94.615 121.799,95.885 121.799,97.155 v2@123.825,97.155
  Top Layer w0.8: v2(138.176,89.585) v2@140.97,86.791
  Bottom Layer w0.2: P1.1 104.782,98.425 123.825,98.425 124.206,98.044 v2(124.206,97.028)
  Bottom Layer w0.6: v2(123.063,88.11) v2(123.063,90.424)
  Bottom Layer w0.8: v2(124.206,97.028) 129.032,97.028 130.175,95.885 130.175,91.396 131.909,89.662 v2@137.839,89.662 ; v2(140.97,86.577) 141.881,86.577 J1.3
VDSTH: R9.2 R10.1 U1.23 | length 15.9
  Top Layer w0.2: R9.2 95.114,74.336 96.216,75.438 v1(97.409,75.438) ; v1(101.346,78.105) 101.346,76.553 101.648,76.251 R10.1 ; v1@101.541,78.232 101.945,78.636 U1.23
  Bottom Layer w0.2: v1@97.536,75.692 97.667,75.823 99.445,75.823 99.884,76.262 99.985,76.262 100.395,76.672 100.395,77.662 100.838,78.105 v1(101.346,78.105)
pads on no net: U1.1 U1.13 U1.37 U1.47 U1.48 U4.3 U4.4 U4.5 U4.6 U4.9 U4.10 U4.11 U4.12

## Other copper
Top Layer:
  rectangle net CSN: 147.8,78.306 151.384,82.042
  rectangle net CSN: 139.954,80.899 149.098,81.915
  rectangle net CSN: 139.954,69.8 141.732,81.915
  rectangle net CSN: 136.525,69.8 141.732,71.12
  rectangle net CSN: 136.525,66.675 139.1,71.12
  rectangle net CSN: 85.344,91.821 86.741,99.568
  rectangle net CSN: 74.549,99.314 87.63,101.092
  rectangle net CSN: 90.13,93.091 93.912,98.044
  rectangle net CSN: 92.456,95.885 100.584,99.441
  rectangle net CSN: 109.728,64.135 139,66.802
  rectangle net CSN: 130.302,73.914 137.668,78.867
  rectangle net CSN: 89.922,66.548 93.091,69.048
  rectangle net CSN: 94.503,66.548 101.945,68.707
  rectangle net CSN: 92.964,66.548 95.123,72.136
  rectangle net CSN: 97.663,66.6 107.442,67.716
  rectangle net CSN: 107.295,64.389 111.506,74.93
  rectangle net CSN: 97.155,81.153 100.945,85.471
Bottom Layer:
  rectangle net CSN: 80.01,72.6 82.5,76.962
  rectangle net CSN: 80.01,76.6 84.582,101.219
  rectangle net CSN: 79.883,72.009 86.614,73.1
  rectangle net VCC: 124.333,97.713 133.2,101.473
  rectangle net CSN: 130.175,73.914 137.839,78.994
  rectangle net VCC: 102.743,97.409 125.095,101.346

## Silkscreen, mask and mechanical layers (free items; w line width, h text height)
Top Overlay:
  text "DIR" at 79.755,97.667 h0.8
  text "BRAKE" at 79.755,95.167 h0.8
  text "TACHO" at 79.8,92.6 h0.8
  text "FF2" at 79.845,89.953 h0.8
  text "FF1" at 79.845,87.553 h0.8
  text "PWM" at 79.745,85.053 h0.8
  text "MODE" at 79.745,82.453 h0.8
  text "CSOUT" at 79.845,79.953 h0.8
  text "RESET" at 79.845,77.453 h0.8
  text "ESF" at 79.745,74.753 h0.8
  text "DIRO" at 79.737,72.453 h0.8
  text "COAST" at 79.732,69.9 h0.8
  text "5VIN" at 93.5,66.8 h0.8
  text "VIN2" at 87.892,66.7 h0.8
  text "Motor Driver Board - BH" at 109.4,64.8 h1.25
Bottom Overlay:
  text "UBC Thunderbots / Ben Hers" at 131.953,96.266 h1.52
Top Solder:
  rectangle: 97.028,81.534 101.092,85.598